# Altium PCB PCB_DE1_projekt_2021-05-03.pcbdoc
Units mm, origin at the board's own origin, x right, y up, seen from the top; angles counter-clockwise.
Board outline 136.4 x 141.67 mm, 2 copper layers (Top Layer, Bottom Layer); 112 components, 90 nets, 322 pads, 73 vias.
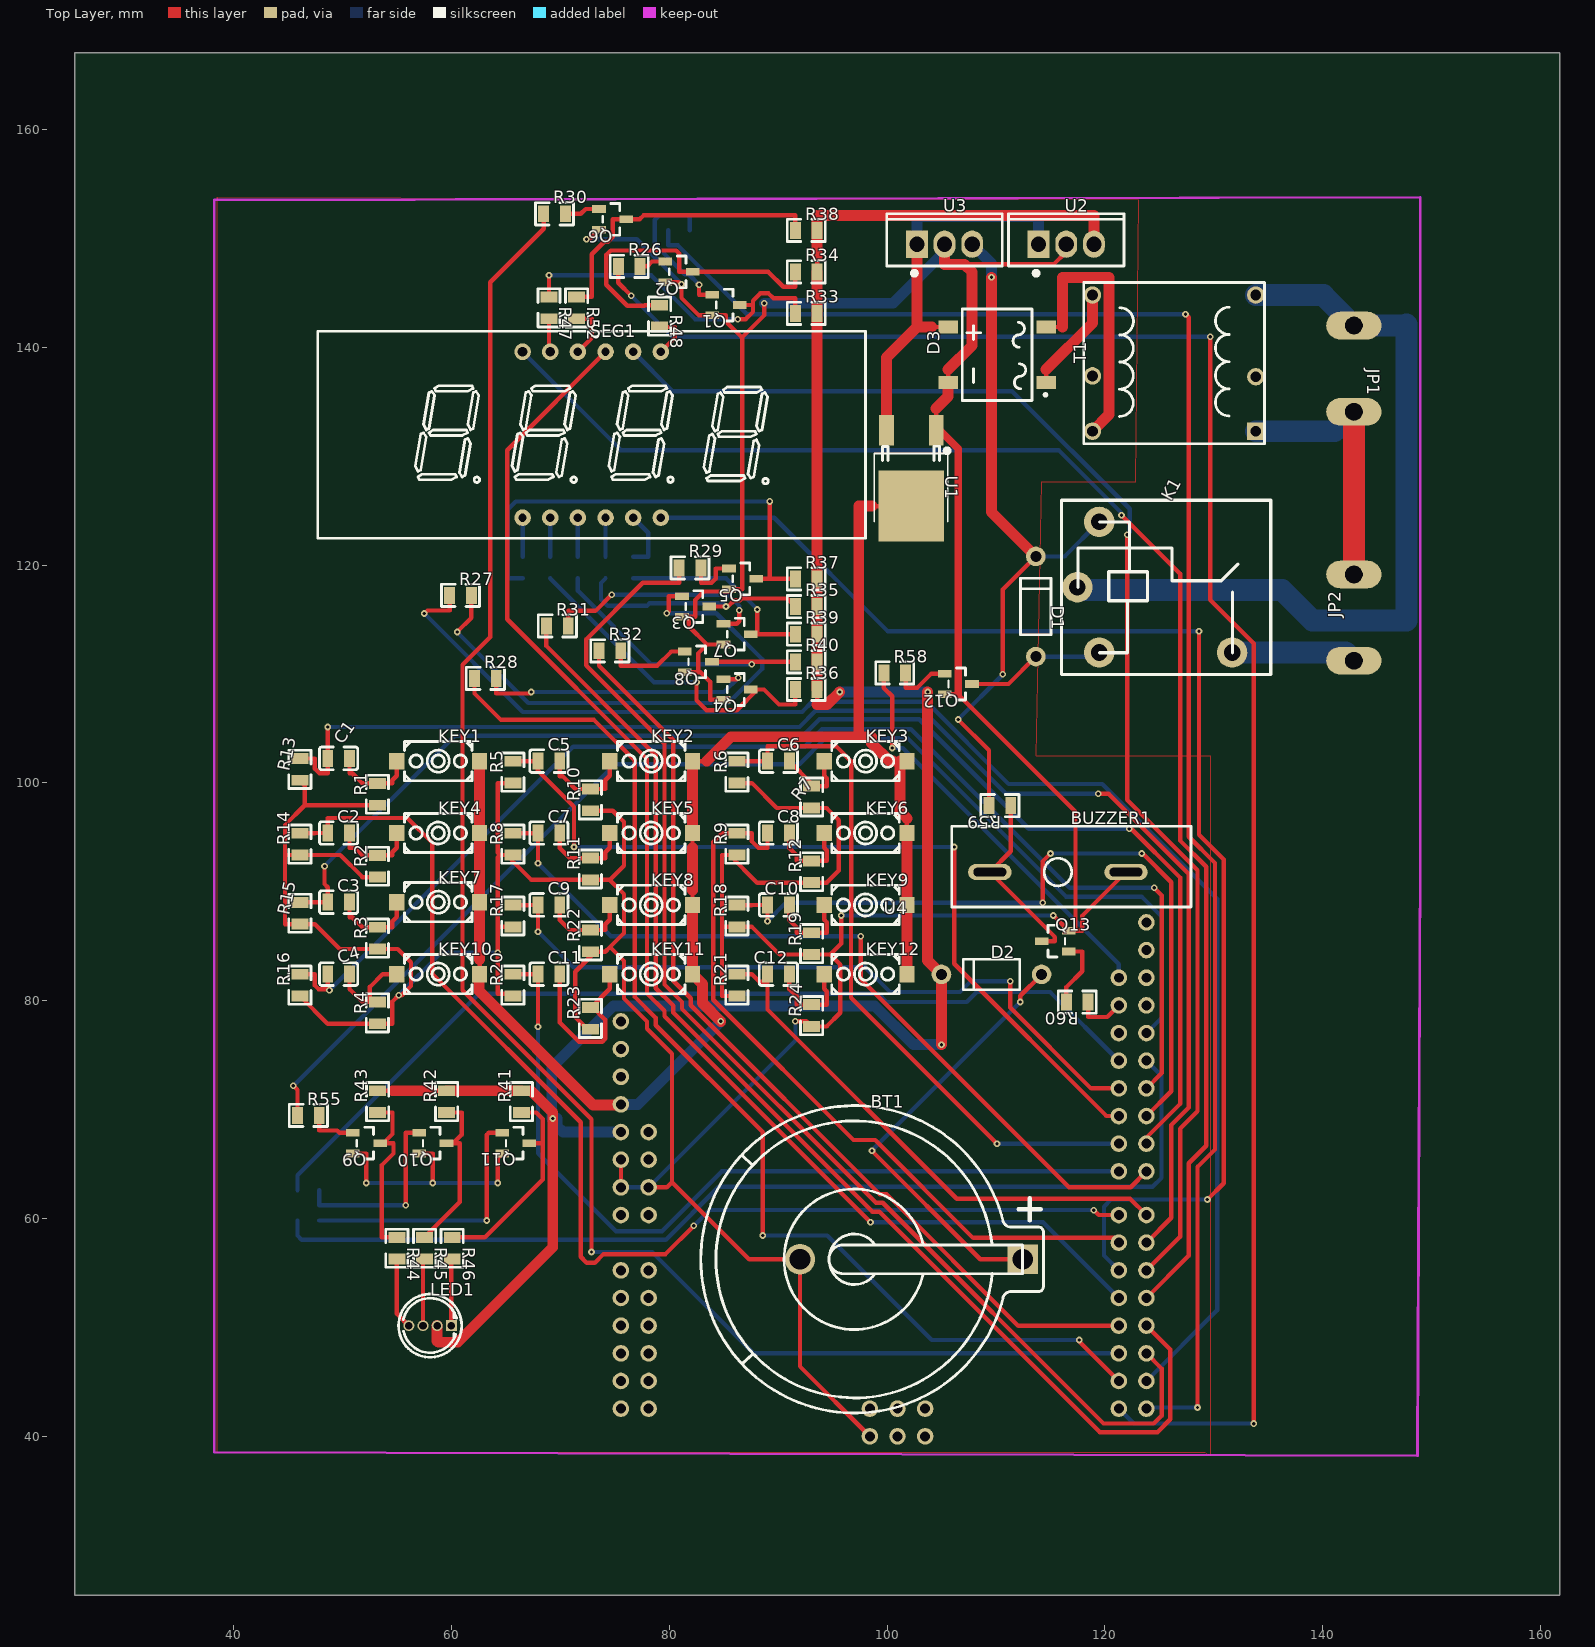
[diagram p0: Top Layer view]
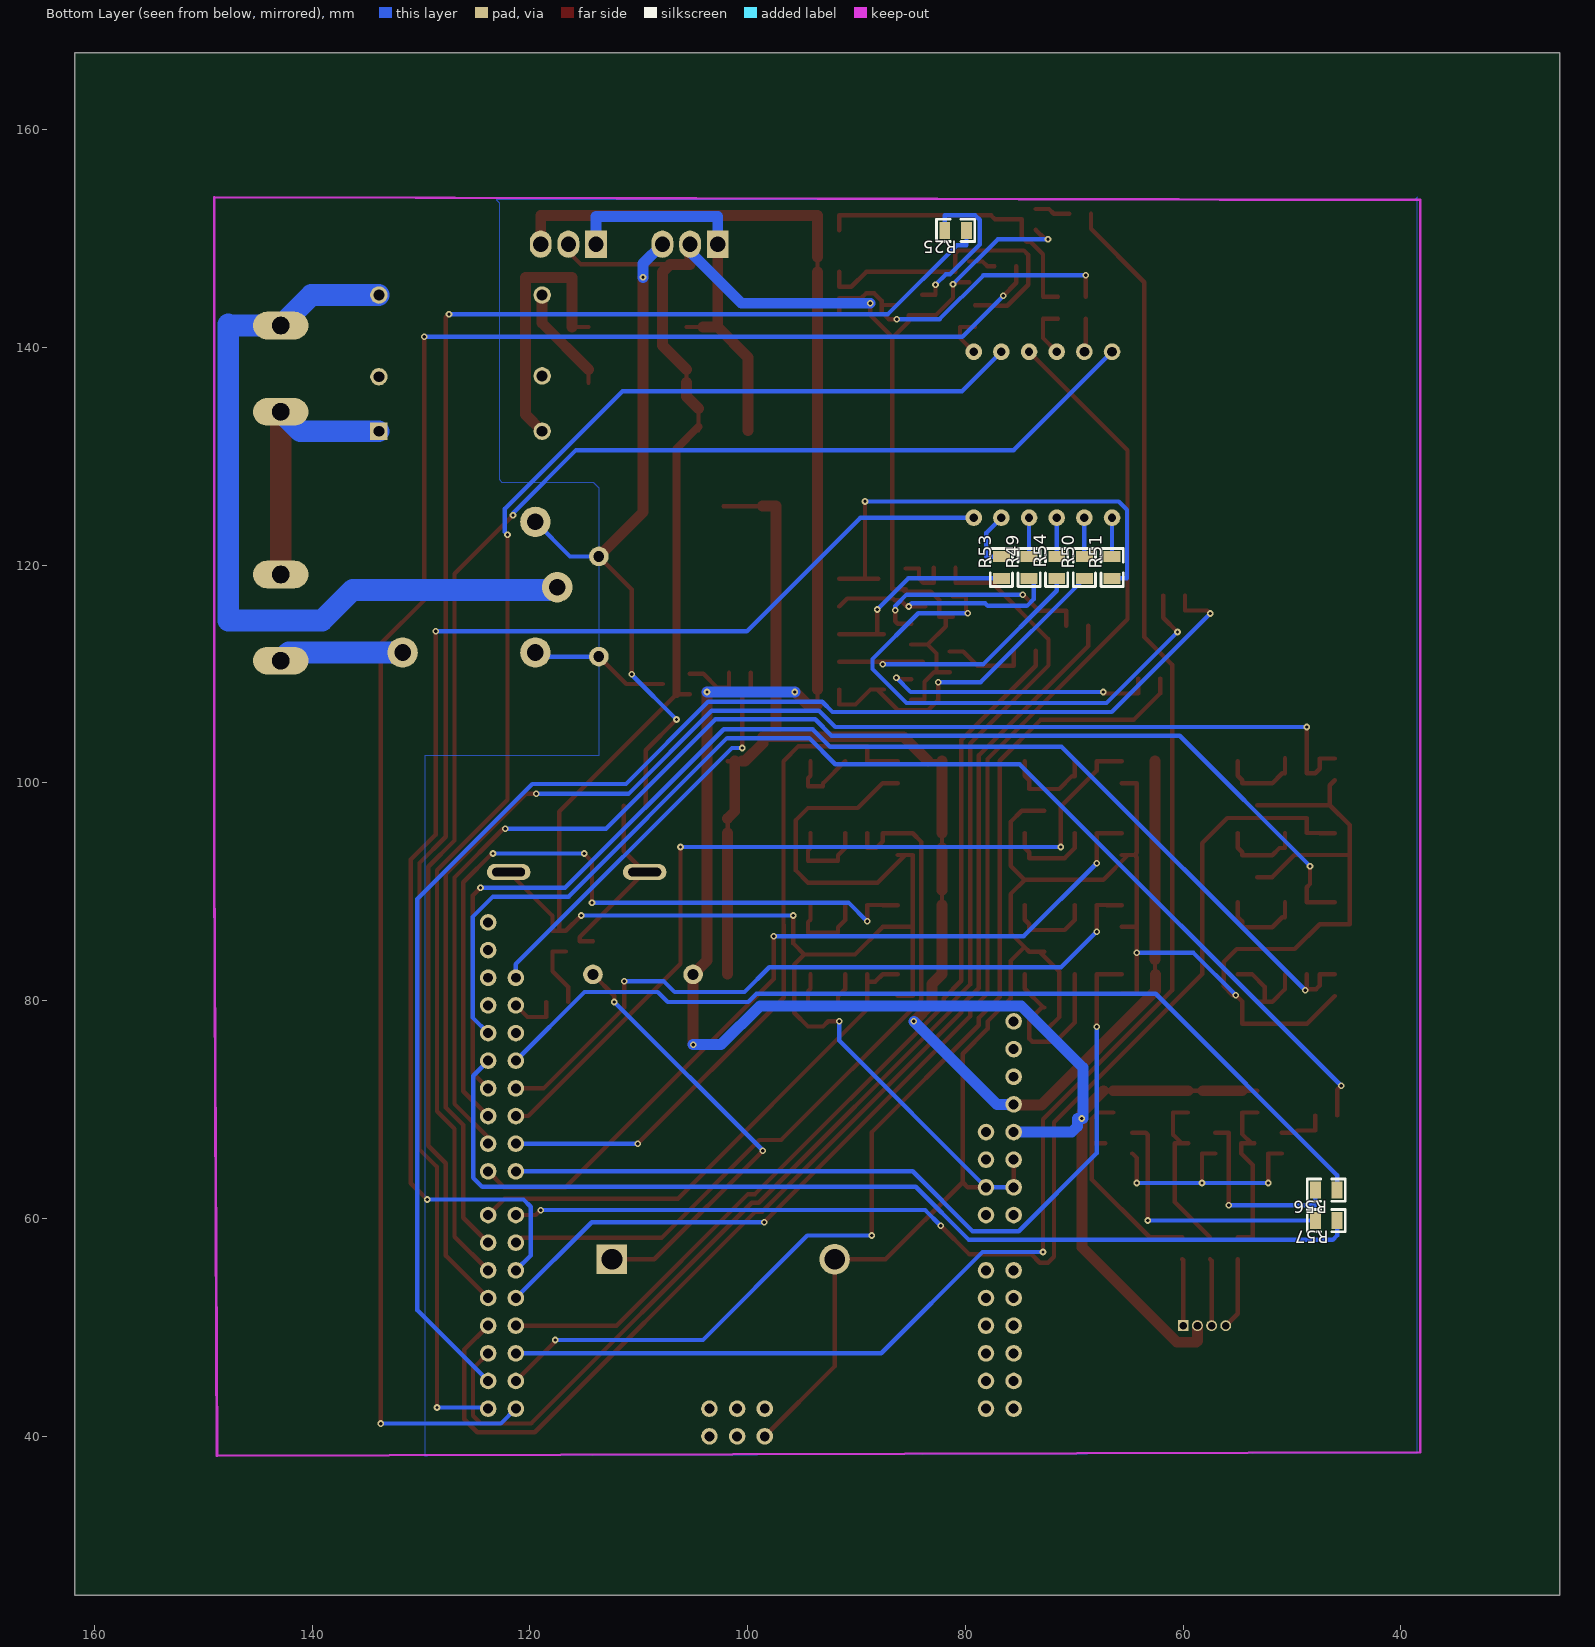
[diagram p1: Bottom Layer view, seen from below]

## Layer stack, top to bottom
Top Layer: signal copper (thickness not stored)
Dielectric: dielectric 0.32, FR-4, Dk 4.8
Bottom Layer: signal copper (thickness not stored)

## Board outline
161.798,25.4 25.4,25.4 25.4,167.069 161.798,167.069

## Components (designator, comment, footprint, x,y, rotation, side; value= is the part's Value field where it differs from the comment)
BT1 "1025" BAT-TH_KEYSTONE-1025 102.235,56.261 r0 top
BUZZER1 "SFN-2207PA12.5" BUZ-TH_L22.0-W7.0-P12.5 115.697,91.821 r0 top
C1 "0.1u" C0805 49.642,102.263 r0 top
C2 "0.1u" C0805 49.642,95.405 r0 top
C3 "0.1u" C0805 49.642,89.055 r0 top
C4 "0.1u" C0805 49.642,82.451 r0 top
C5 "0.1u" C0805 68.946,102.009 r0 top
C6 "0.1u" C0805 90.028,102.009 r0 top
C7 "0.1u" C0805 68.946,95.405 r0 top
C8 "0.1u" C0805 90.028,95.405 r0 top
C9 "0.1u" C0805 68.946,88.801 r0 top
C10 "0.1u" C0805 90.028,88.801 r0 top
C11 "0.1u" C0805 68.946,82.451 r0 top
C12 "0.1u" C0805 90.028,82.451 r0 top
D1 "1N4007" DO-41_BD2.4-L4.7-P8.70-D0.9-RD 113.665,116.205 r270 top
D2 "1N4007" DO-41_BD2.4-L4.7-P8.70-D0.9-RD 109.601,82.423 r0 top
D3 "DB106S" DBS_L8.4-W6.4-P5.10-LS10.2-BL 110.109,139.319 r90 top
JP1 "AC_IN" 1-1123724-2 142.875,138.049 r270 top
JP2 "Electromagnet" 1-1123724-2 142.875,115.189 r90 top
K1 "HF3F-L/12-1HL1T" RELAY-TH_HF3F-L-XX-1HL1T 124.587,117.983 r0 top
KEY1 "K2-3.6×6.1_SMD" KEY-SMD_2P-L6.2-W3.6-LS8.0 58.786,102.009 r0 top
KEY2 "K2-3.6×6.1_SMD" KEY-SMD_2P-L6.2-W3.6-LS8.0 78.344,102.009 r0 top
KEY3 "K2-3.6×6.1_SMD" KEY-SMD_2P-L6.2-W3.6-LS8.0 98.029,102.009 r0 top
KEY4 "K2-3.6×6.1_SMD" KEY-SMD_2P-L6.2-W3.6-LS8.0 58.786,95.405 r0 top
KEY5 "K2-3.6×6.1_SMD" KEY-SMD_2P-L6.2-W3.6-LS8.0 78.344,95.405 r0 top
KEY6 "K2-3.6×6.1_SMD" KEY-SMD_2P-L6.2-W3.6-LS8.0 98.029,95.405 r0 top
KEY7 "K2-3.6×6.1_SMD" KEY-SMD_2P-L6.2-W3.6-LS8.0 58.786,89.055 r0 top
KEY8 "K2-3.6×6.1_SMD" KEY-SMD_2P-L6.2-W3.6-LS8.0 78.344,88.801 r0 top
KEY9 "K2-3.6×6.1_SMD" KEY-SMD_2P-L6.2-W3.6-LS8.0 98.029,88.801 r0 top
KEY10 "K2-3.6×6.1_SMD" KEY-SMD_2P-L6.2-W3.6-LS8.0 58.786,82.451 r0 top
KEY11 "K2-3.6×6.1_SMD" KEY-SMD_2P-L6.2-W3.6-LS8.0 78.344,82.451 r0 top
KEY12 "K2-3.6×6.1_SMD" KEY-SMD_2P-L6.2-W3.6-LS8.0 98.029,82.451 r0 top
LED1 "RGB" LED-TH_4P-BD5.8-P1.30 58.039,50.165 r0 top
Q1 "NSS12201LT1G" SOT-23-3_L2.9-W1.3-P1.90-LS2.4-BR 85.217,143.891 r180 top
Q2 "NSS12201LT1G" SOT-23-3_L2.9-W1.3-P1.90-LS2.4-BR 80.899,146.939 r180 top
Q3 "NSS12201LT1G" SOT-23-3_L2.9-W1.3-P1.90-LS2.4-BR 82.423,116.205 r180 top
Q4 "NSS12201LT1G" SOT-23-3_L2.9-W1.3-P1.90-LS2.4-BR 86.233,108.585 r180 top
Q5 "NSS12201LT1G" SOT-23-3_L2.9-W1.3-P1.90-LS2.4-BR 86.741,118.745 r180 top
Q6 "NSS12201LT1G" SOT-23-3_L2.9-W1.3-P1.90-LS2.4-BR 74.803,151.765 r180 top
Q7 "NSS12201LT1G" SOT-23-3_L2.9-W1.3-P1.90-LS2.4-BR 86.233,113.665 r180 top
Q8 "NSS12201LT1G" SOT-23-3_L2.9-W1.3-P1.90-LS2.4-BR 82.677,111.125 r180 top
Q9 "NSS12201LT1G" SOT-23-3_L2.9-W1.3-P1.90-LS2.4-BR 52.197,66.929 r180 top
Q10 "NSS12201LT1G" SOT-23-3_L2.9-W1.3-P1.90-LS2.4-BR 58.293,66.929 r180 top
Q11 "NSS12201LT1G" SOT-23-3_L2.9-W1.3-P1.90-LS2.4-BR 65.913,66.929 r180 top
Q12 "NSS12201LT1G" SOT-23-3_L2.9-W1.3-P1.90-LS2.4-BR 106.553,109.093 r180 top
Q13 "NSS12201LT1G" SOT-23-3_L2.9-W1.3-P1.90-LS2.4-BR 115.443,85.471 r0 top
R1 "10k" R0805#1 53.198,98.961 r90 top
R2 "10k" R0805#1 53.198,92.357 r90 top
R3 "10k" R0805#1 53.198,85.753 r90 top
R4 "10k" R0805#1 53.198,78.895 r90 top
R5 "1k" R0805#1 65.644,100.993 r90 top
R6 "1k" R0805#1 86.218,100.993 r90 top
R7 "10k" R0805#1 93.076,98.707 r90 top
R8 "1k" R0805#1 65.644,94.389 r90 top
R9 "1k" R0805#1 86.218,94.389 r90 top
R10 "10k" R0805#1 72.756,98.453 r90 top
R11 "10k" R0805#1 72.756,92.103 r90 top
R12 "10k" R0805#1 93.076,91.849 r90 top
R13 "1k" R0805#1 46.086,101.247 r90 top
R14 "1k" R0805#1 46.086,94.389 r90 top
R15 "1k" R0805#1 46.086,88.039 r90 top
R16 "1k" R0805#1 46.086,81.435 r90 top
R17 "1k" R0805#1 65.644,87.785 r90 top
R18 "1k" R0805#1 86.218,87.785 r90 top
R19 "10k" R0805#1 93.076,85.245 r90 top
R20 "1k" R0805#1 65.644,81.435 r90 top
R21 "1k" R0805#1 86.218,81.435 r90 top
R22 "10k" R0805#1 72.756,85.499 r90 top
R23 "10k" R0805#1 72.756,78.387 r90 top
R24 "10k" R0805#1 93.076,78.641 r90 top
R25 "1k" R0805#2 80.899,150.749 r180 bottom
R26 "1k" R0805#1 76.327,147.447 r0 top
R27 "1k" R0805#1 60.833,117.221 r0 top
R28 "1k" R0805#1 63.119,109.601 r0 top
R29 "1k" R0805#1 81.915,119.761 r0 top
R30 "1k" R0805#1 69.469,152.273 r0 top
R31 "1k" R0805#1 69.723,114.427 r0 top
R32 "1k" R0805#1 74.549,112.141 r0 top
R33 "1k" R0805#1 92.583,143.129 r0 top
R34 "1k" R0805#1 92.583,146.939 r0 top
R35 "1k" R0805#1 92.583,116.205 r0 top
R36 "1k" R0805#1 92.583,108.585 r0 top
R37 "1k" R0805#1 92.583,118.745 r0 top
R38 "1k" R0805#1 92.583,150.749 r0 top
R39 "1k" R0805#1 92.583,113.665 r0 top
R40 "1k" R0805#1 92.583,111.125 r0 top
R41 "1k" R0805#1 66.421,70.739 r90 top
R42 "1k" R0805#1 59.563,70.739 r90 top
R43 "1k" R0805#1 53.213,70.739 r90 top
R44 "1k" R0805#1 54.991,57.277 r270 top
R45 "1k" R0805#1 57.531,57.277 r270 top
R46 "1k" R0805#1 60.071,57.277 r270 top
R47 "1k" R0805#1 68.961,143.637 r270 top
R48 "1k" R0805#1 79.121,142.875 r270 top
R49 "1k" R0805#2 74.153,119.789 r270 bottom
R50 "1k" R0805#2 69.073,119.789 r270 bottom
R51 "1k" R0805#2 66.533,119.789 r270 bottom
R52 "1k" R0805#1 71.501,143.637 r270 top
R53 "1k" R0805#2 76.693,119.789 r270 bottom
R54 "1k" R0805#2 71.613,119.789 r270 bottom
R55 "1k" R0805#1 46.863,69.469 r0 top
R56 "1k" R0805#2 46.863,62.611 r180 bottom
R57 "1k" R0805#2 46.863,59.817 r180 bottom
R58 "1k" R0805#1 100.711,110.109 r0 top
R59 "1k" R0805#1 110.363,97.917 r180 top
R60 "1k" R0805#1 117.475,79.883 r180 top
SEG1 "SEG-TH_0.56×4" LED-SEG-TH_12P-L50.3-W19.0-P2.54-S15.24-BL 72.883,131.981 r0 top
T1 "T60403-K4096-X047" IND-TH_6P-L14.8-W16.6-P5.00-D0.5-S15.00 126.365,138.557 r90 top
U1 "LD1117DT33CTR" TO-252-2_L6.5-W6.1-P4.58-LS10.0-TL 102.235,128.905 r270 top
U2 "7805" TO-220-3_L10.0-W4.5-P2.54-L 116.459,149.479 r0 top
U3 "7812(TO-220)" TO-220-3_L10.0-W4.5-P2.54-L 105.283,149.479 r0 top
U4 "ARTY SHIELD" ARTYZ7-SHIELD 75.565,78.105 r0 top

## Footprints (in the part's own frame and the unit in brackets; to place one, negate y for a bottom-side part, rotate by r counter-clockwise, add the part's x,y. Pads: shape width x height; smd on the part's side, far side on the other; paste and mask are expansions set on the pad)
1-1123724-2 [mil]
  oval 100x200 hole 63: 12VIN(-155.91,0) VCC(155.91,0)
ARTYZ7-SHIELD [mil]
  round 60 hole 36: 1(0,0) 2(0,-100) 3(0,-200) 4(0,-300) 5(0,-400) 6(100,-400) 7(0,-500) 8(100,-500) 9(0,-600) 10(100,-600) 11(0,-700) 12(100,-700) 13(0,-900) 14(100,-900) 15(0,-1000) 16(100,-1000) 17(0,-1100) 18(100,-1100) 19(0,-1200) 20(100,-1200) 21(0,-1300) 22(100,-1300) 23(0,-1400) 24(100,-1400) 25(1900,357.87) 26(1900,257.87) 27(1800,157.87) 28(1900,157.87) 29(1800,57.87) 30(1900,57.87) 31(1800,-42.13) 32(1900,-42.13) 33(1800,-142.13) 34(1900,-142.13) 35(1800,-242.13) 36(1900,-242.13) 37(1800,-342.13) 38(1900,-342.13) 39(1800,-442.13) 40(1900,-442.13) 41(1800,-542.13) 42(1900,-542.13) 43(1800,-700) 44(1900,-700) 45(1800,-800) 46(1900,-800) 47(1800,-900) 48(1900,-900) 49(1800,-1000) 50(1900,-1000) 51(1800,-1100) 52(1900,-1100) 53(1800,-1200) 54(1900,-1200) 55(1800,-1300) 56(1900,-1300) 57(1800,-1400) 58(1900,-1400) 59(900,-1400) 60(1000,-1400) 61(1100,-1400) 62(900,-1500) 63(1000,-1500) 64(1100,-1500)
BAT-TH_KEYSTONE-1025 [mm]
  rect 2.8x2.7 hole 1.9: 1(10.225,0)
  round 2.8 hole 1.9: 2(-10.225,0)
  silkscreen extent -19.34,-14.12 12.12,14.11
BUZ-TH_L22.0-W7.0-P12.5 [mm]
  oval 4x1.5 hole 0.8 slot 3 at 0 deg: 1(-6.25,0) 2(6.25,0)
  silkscreen extent -9.75,-3.2 12.22,4.2
C0805 [mm]
  rect 1x1.55 smd: 1(-1,0) 2(1,0)
  silkscreen extent -1.75,-1.04 1.75,1.04
DBS_L8.4-W6.4-P5.10-LS10.2-BL [mm]
  rect 1.2x1.8 smd: 1(-2.55,-4.5) 2(2.55,-4.5) 3(2.55,4.5) 4(-2.55,4.5)
  silkscreen extent -4.2,-4.57 4.2,3.2
DO-41_BD2.4-L4.7-P8.70-D0.9-RD [mm]
  round 1.8 hole 1: 1(-4.6,0) 2(4.6,0)
  silkscreen extent -2.6,-1.4 2.6,1.4
IND-TH_6P-L14.8-W16.6-P5.00-D0.5-S15.00 [mm]
  rect 1.6x1.6 hole 1: 1(-6.25,-7.5)
  round 1.6 hole 1: 2(-1.25,-7.5) 3(6.25,-7.5) 4(6.25,7.5) 5(-1.17,7.5) 6(-6.25,7.5)
  silkscreen extent -7.4,-8.3 7.4,8.3
KEY-SMD_2P-L6.2-W3.6-LS8.0 [mm]
  rect 1.4x1.5 smd: 1(-3.8,0) 2(3.8,0)
  silkscreen extent -3.1,-1.8 3.1,1.8
LED-SEG-TH_12P-L50.3-W19.0-P2.54-S15.24-BL [mil]
  round 60 hole 30: 1(-250,-300) 2(-150,-300) 3(-50,-300) 4(50,-300) 5(150,-300) 6(250,-300) 7(250,300) 8(150,300) 9(50,300) 10(-50,300)
  round 60 hole 36: 11(-150,300) 12(-250,300)
  silkscreen extent -990,-374 990,374
LED-TH_4P-BD5.8-P1.30 [mm]
  rect 1x1 hole 0.7: 1(1.95,0)
  round 1 hole 0.7: 2(0.65,0) 3(-0.65,0) 4(-1.95,0)
  silkscreen extent -2.9,-2.9 2.9,2.9
R0805#1 [mm]
  rect 1x1.55 smd: 1(-1,0) 2(1,0)
  silkscreen extent -1.75,-1.02 1.75,1.02
R0805#2 [mm]
  rect 1x1.55 smd: 1(1,0) 2(-1,0)
  silkscreen extent -1.75,-1.02 1.75,1.02
RELAY-TH_HF3F-L-XX-1HL1T [mil]
  round 110 hole 60: 1(-200.85,236.2) 2(-200.85,-236.2) 3(279.55,-236.2) 4(-279.55,0)
  silkscreen extent -337,-316 419,314
SOT-23-3_L2.9-W1.3-P1.90-LS2.4-BR [mm]
  rect 1.25x0.7 smd: 1(1.25,-0.95) 2(1.25,0.95) 3(-1.25,0)
  silkscreen extent -0.65,-1.46 0.9,1.46
TO-220-3_L10.0-W4.5-P2.54-L [mm]
  rect 2x2.5 hole 1.4: 1(-2.54,0)
  oval 2x2.5 hole 1.4: 2(0,0) 3(2.54,0)
  silkscreen extent -5.3,-2.86 5.3,2.8
TO-252-2_L6.5-W6.1-P4.58-LS10.0-TL [mm]
  rect 2.8x1.35 smd: 1(-3.475,2.275) 3(-3.475,-2.275)
  rect 6.5x6 smd: 4(3.475,-0.017)
  silkscreen extent -2.01,-3.39 4.9,3.48

## Via types
v1: diameter 0.61, hole 0.31, Top Layer to Bottom Layer, 73 vias

## Nets (pads, with @x,y where several pads share a name; then routed paths per layer and width w, separated by ;. In a path a pad name is that pad's centre, name@x,y a point inside that pad or via, vN(x,y) a via of type N, cw(c..) or ccw(c..) an arc to the next point about the centre after c; other vN are vias at no path point)
+3.3V: KEY1.2 KEY2.2 KEY3.2 KEY4.2 KEY5.2 KEY6.2 KEY7.2 KEY8.2 KEY9.2 KEY10.2 KEY11.2 KEY12.2 U1.4 U4.4 | length 144.5
  Top Layer w0.4: KEY10.2 62.586,83.802 ; KEY8.2 82.144,90.152 ; 82.144,94.054 KEY5.2 ; KEY2.2 83.447,102.009 ; 98.616,125.43 U1.4 ; 100.526,102.009 101.179,102.009 KEY3.2 ; KEY6.2 101.829,96.081 101.829,96.756
  Top Layer w1: KEY10.2@62.527,82.408 62.527,80.919 73.007,70.442 U4.4@75.507,70.442 ; 62.586,83.802 KEY7.2 KEY4.2 KEY1.2 ; KEY8.2 KEY11.2 83.063,81.532 83.063,79.787 v1(84.735,78.113) ; 82.144,90.152 82.144,94.054 ; KEY5.2 KEY2.2 ; 83.447,102.009 85.687,104.249 98.588,104.249 ; 98.616,125.43 97.409,125.43 97.409,104.249 98.588,104.249 ; 100.526,102.009 100.234,102.009 98.588,103.652 98.588,104.249 ; KEY3.2@101.179,102.009 101.179,97.409 101.829,96.756 ; KEY12.2 KEY9.2 KEY6.2
  Bottom Layer w1: U4.4 77.107,70.485 v1(84.735,78.113)
+5V: D2.1 LED1.2 R33.2 R34.2 R35.2 R36.2 R37.2 R38.2 R39.2 R40.2 R41.2 R42.2 R43.2 U2.3 U4.5 | length 212.6
  Top Layer w0.4: R43.2 54.59,71.74 ; 58.187,71.74 R42.2 ; 93.584,107.208 R36.2 ; R34.2 93.584,147.627 93.584,148.316
  Top Layer w1: 54.59,71.74 58.187,71.74 ; LED1.2 58.689,48.753 58.801,48.641 60.579,48.641 69.299,57.361 v1(69.299,69.195) 69.299,69.744 67.303,71.74 ; R42.2 R41.2 ; 93.584,107.208 94.501,107.208 v1(95.654,108.359) ; R36.2 R40.2 R39.2 R35.2 R37.2 R33.2 R34.2 ; 93.584,148.316 R38.2 93.584,152.126 118.999,152.126 U2.3 ; v1(103.731,108.359) 103.731,83.693 D2.1 v1(105.001,75.971)
  Bottom Layer w0.4: v1(69.299,69.195) 69.721,69.195
  Bottom Layer w1: U4.5 70.231,67.945 69.721,68.456 69.721,69.195 69.215,69.195 69.215,73.881 74.867,79.533 98.877,79.533 102.436,75.971 v1(105.001,75.971) ; v1(95.654,108.359) v1(103.731,108.359)
+12V: D1.1 K1.1 R59.2 U3.3 | length 65.2
  Top Layer w0.4: v1(106.53,105.832) 109.362,102.997 R59.2 ; v1(110.632,110.002) 110.632,117.772 D1.1
  Top Layer w1: v1(109.601,146.431) 109.601,124.869 D1.1
  Bottom Layer w0.4: v1(106.53,105.832) 110.632,109.934 v1(110.632,110.002) ; D1.1 116.307,120.805 K1.1@119.484,123.983
  Bottom Layer w1: U3.3 109.601,147.701 v1(109.601,146.431)
A: Q1.3 R33.1 R47.1 | length 31.9
  Top Layer w0.4: R47.1 v1(68.961,146.616) ; v1(86.294,142.598) 87.031,142.598 87.694,143.261 87.694,143.891 ; R33.1 91.582,144.506 89.576,144.506 89.116,144.963 88.364,144.963 87.694,144.292 87.694,143.891 ; 87.694,143.891 Q1.3 87.694,143.891
  Bottom Layer w0.4: v1(68.961,146.616) 78.349,146.616 82.37,142.598 v1(86.294,142.598)
A0: SEG1.12 U4.50 | length 138.7
  Top Layer w0.4: v1(121.539,124.587) 126.914,119.212 126.914,94.724 129.322,92.316 129.322,66.68 127.716,65.075 127.716,56.596 U4.50
  Bottom Layer w0.4: SEG1.12 75.563,130.571 115.761,130.571 121.486,124.846 121.486,124.64 v1(121.539,124.587)
A1: SEG1.9 U4.49 | length 123.2
  Top Layer w0.4: SEG1.9 65.116,130.564 65.116,115.047 77.963,102.202 77.963,80.681 79.566,79.075 79.566,78.585 v1(98.484,59.67)
  Bottom Layer w0.4: v1(98.484,59.67) 114.321,59.67 U4.49
A2: SEG1.8 U4.48 | length 126.2
  Top Layer w0.4: v1(122.047,122.809) 122.047,98.456 128.519,91.984 128.519,69.863 126.914,68.257 126.914,58.334 U4.48
  Bottom Layer w0.4: SEG1.8 80.31,135.984 111.483,135.984 122.288,125.179 122.288,123.051 v1(122.047,122.809)
A3: SEG1.6 U4.47 | length 123.7
  Top Layer w0.4: v1(128.651,113.919) 128.651,95.255 130.927,92.979 130.927,63.249 v1(129.426,61.747)
  Bottom Layer w0.4: SEG1.6 89.642,124.361 100.084,113.919 v1(128.651,113.919) ; U4.47 119.921,56.609 119.921,61.087 120.582,61.747 v1(129.426,61.747)
B: Q2.3 R34.1 R48.1 | length 29.7
  Top Layer w0.4: R48.1 77.745,143.876 77.691,143.822 76.152,143.822 74.224,145.75 74.224,148.499 74.625,148.902 80.648,148.902 80.922,148.628 80.922,146.939 81.544,146.939 Q2.3 89.103,146.939 90.48,145.562 91.582,145.562 R34.1
BT1_1: BT1.1 D2.2 | length 40.6
  Top Layer w0.4: v1(98.618,66.215) 108.573,56.261 BT1.1 ; v1(112.243,79.893) 112.243,80.465 D2.2
  Bottom Layer w0.4: v1(98.618,66.215) 98.618,66.266 v1(112.243,79.893)
BUZZ_PIN: R60.1 U4.29 | length 4.6
  Top Layer w0.4: R60.1 118.476,78.506 120.216,78.506 U4.29
BUZZER1_1: BUZZER1.1 Q13.3 R59.1 | length 16.9
  Top Layer w0.4: R59.1 111.364,93.736 BUZZER1.1 115.42,85.847 115.42,85.471 Q13.3
C: Q3.3 R35.1 R49.1 | length 22.6
  Top Layer w0.4: Q3.3 84.9,116.205 v1(85.212,116.205) 85.39,116.205 85.964,116.779 86.497,116.779 86.655,116.939 90.848,116.939 R35.1
  Bottom Layer w0.4: R49.1 73.736,118.372 73.736,116.881 74.351,116.263 77.953,116.263 78.189,116.5 84.918,116.5 v1(85.212,116.205)
C5_2: C5.2 KEY2.1 R10.2 | length 8.8
  Top Layer w0.4: C5.2 69.947,100.632 70.201,100.632 71.379,99.454 R10.2 73.444,99.454 74.133,99.454 74.133,100.246 74.544,100.658 KEY2.1
C6_2: C6.2 KEY3.1 R7.2 | length 6.9
  Top Layer w0.4: C6.2 93.076,99.962 R7.2 94.453,99.708 94.453,100.432 94.229,100.658 KEY3.1
C7_2: C7.2 KEY5.1 R11.2 | length 8.4
  Top Layer w0.4: C7.2 69.947,94.028 70.871,93.104 71.379,93.104 R11.2 74.133,93.104 74.133,93.642 74.544,94.054 KEY5.1
C8_2: C8.2 KEY6.1 R12.2 | length 8.2
  Top Layer w0.4: C8.2 91.029,94.028 91.699,93.358 91.699,92.85 R12.2 94.453,92.85 94.453,93.828 94.229,94.054 KEY6.1
C9_2: C9.2 KEY8.1 R22.2 | length 8.4
  Top Layer w0.4: C9.2 69.947,87.424 70.871,86.5 71.379,86.5 R22.2 74.133,86.5 74.133,87.038 74.544,87.45 KEY8.1
C10_2: C10.2 KEY9.1 R19.2 | length 8.2
  Top Layer w0.4: C10.2 91.029,87.424 91.699,86.754 91.699,86.246 R19.2 94.453,86.246 94.453,87.224 94.229,87.45 KEY9.1
C11_2: C11.2 KEY11.1 R23.2 | length 16.9
  Top Layer w0.4: C11.2 69.947,78.011 71.72,76.238 73.846,76.238 74.133,76.525 74.133,78.247 72.995,79.388 R23.2@72.794,79.388 ; R23.2 R23.2@72.794,79.388 ; KEY11.1 74.544,81.1 72.832,79.388 R23.2@72.794,79.388
C12_2: C12.2 KEY12.1 R24.2 | length 8.7
  Top Layer w0.4: C12.2 91.029,81.074 91.699,80.404 91.699,79.642 R24.2 94.453,79.642 94.453,80.874 94.229,81.1 KEY12.1
CA: R25.1 U4.58 | length 158.4
  Top Layer w0.4: v1(127.417,143.06) 127.717,142.763 127.717,95.057 130.124,92.647 130.124,66.347 128.519,64.742 v1(128.519,42.649)
  Bottom Layer w0.4: R25.1 79.898,149.372 80.803,149.372 87.115,143.06 v1(127.417,143.06) ; U4.58 123.929,42.649 v1(128.519,42.649)
CB: R26.1 U4.57 | length 172.4
  Top Layer w0.4: R26.1 75.326,145.931 v1(76.528,144.729) ; v1(129.682,140.965) 129.682,116.817 133.688,112.812 v1(133.688,41.173)
  Bottom Layer w0.4: v1(76.528,144.729) 80.292,140.965 v1(129.682,140.965) ; U4.57 122.657,41.173 v1(133.688,41.173)
CC: R27.1 U4.56 | length 135.2
  Top Layer w0.4: v1(57.519,115.56) 57.8,115.844 59.832,115.844 R27.1
  Bottom Layer w0.4: v1(57.519,115.56) 66.553,106.523 92.205,106.523 93.134,107.452 103.625,107.452 111.168,99.908 119.774,99.908 130.333,89.347 130.333,51.593 U4.56
CD: R28.1 U4.55 | length 105.4
  Top Layer w0.4: R28.1 62.118,108.224 64.552,105.794 73.096,105.794 76.845,102.045 76.845,80.345 78.763,78.428 78.763,77.762 88.585,67.943 v1(88.585,58.44) ; v1(117.656,48.852) 117.656,48.715 U4.55
  Bottom Layer w0.4: v1(88.585,58.44) 94.514,58.44 104.102,48.852 v1(117.656,48.852)
CDP: R32.1 U4.51 | length 87.5
  Top Layer w0.4: R32.1 73.548,110.764 80.371,103.942 80.371,81.834 81.976,80.228 81.976,79.591 99.319,62.245 99.959,62.245 112.04,50.165 U4.51
CE: R29.1 U4.54 | length 116.1
  Top Layer w0.4: R29.1 80.914,118.384 77.564,118.384 72.372,113.19 72.372,110.802 79.568,103.604 79.568,81.493 81.174,79.888 81.174,79.253 98.984,61.443 99.619,61.443 119.881,41.181 124.506,41.181 125.217,41.892 125.217,46.233 U4.54
CF: R30.1 U4.53 | length 155.6
  Top Layer w0.4: R30.1 68.468,150.896 63.566,145.992 63.566,113.411 61.016,110.863 61.016,80.97 72.868,69.119 v1(72.868,56.929)
  Bottom Layer w0.4: v1(72.868,56.929) 78.428,56.929 87.732,47.625 U4.53
CG: R31.1 U4.52 | length 111.9
  Top Layer w0.4: R31.1 68.722,112.575 78.766,102.535 78.766,81.161 80.371,79.555 80.371,78.923 98.651,60.64 99.286,60.64 119.548,40.378 124.836,40.378 126.02,41.56 126.02,47.97 U4.52
D: Q4.3 R36.1 R50.1 | length 31.8
  Top Layer w0.4: v1(82.507,109.261) 82.507,107.6 83.424,106.683 86.195,106.683 Q4.3@88.098,108.585 ; Q4.3 Q4.3@88.098,108.585 ; R36.1 91.582,107.208 90.086,107.208 88.71,108.585 Q4.3@88.098,108.585
  Bottom Layer w0.4: R50.1 78.601,109.261 v1(82.507,109.261)
DP: Q8.3 R40.1 R54.1 | length 27.8
  Top Layer w0.4: Q8.3 85.154,111.125 v1@87.587,111.125 ; v1(87.587,110.894) v1@87.587,111.125 ; R40.1 v1@87.587,111.125
  Bottom Layer w0.4: R54.1 71.613,117.653 78.372,110.894 v1(87.587,110.894)
E: Q5.3 R37.1 R51.1 | length 44
  Top Layer w0.4: v1(89.218,125.857) 89.218,118.745 ; R37.1 89.218,118.745 ; 89.218,118.745 Q5.3 89.218,118.745
  Bottom Layer w0.4: R51.1 65.156,118.788 65.156,125.103 65.908,125.857 v1(89.218,125.857)
F: Q6.3 R38.1 R52.1 | length 27.8
  Top Layer w0.4: R52.1 72.878,144.638 72.878,148.554 74.031,149.705 74.379,149.705 74.826,150.152 74.826,151.765 Q6.3 76.668,151.765 77.28,151.765 77.64,152.126 91.582,152.126 R38.1
G: Q7.3 R39.1 R53.1 | length 19
  Top Layer w0.4: Q7.3 Q7.3@88.098,113.665 ; v1(88.098,115.936) Q7.3@88.098,113.665 ; R39.1 88.71,113.665 Q7.3@88.098,113.665
  Bottom Layer w0.4: R53.1 78.07,118.788 85.245,118.788 v1(88.098,115.936)
GND: BT1.2 BUZZER1.2 D3.4 Q1.2 Q2.2 Q3.2 Q4.2 Q5.2 Q6.2 Q7.2 Q8.2 Q12.2 Q13.2 R1.1 R2.1 R3.1 R4.1 R5.1 R6.1 R7.1 R8.1 R9.1 R10.1 R11.1 R12.1 R13.1 R14.1 R15.1 R16.1 R17.1 R18.1 R19.1 R20.1 R21.1 R22.1 R23.1 R24.1 U1.1 U2.2 U3.2 U4.7 U4.9 U4.10 U4.62 | length 489.7
  Top Layer w0.4: R16.1 48.626,77.894 R4.1 54.575,77.894 54.575,79.929 v1(55.156,80.508) 55.441,80.508 56.289,81.359 56.289,83.536 55.073,84.752 R3.1 53.17,84.752 51.821,84.752 49.749,84.752 47.463,87.038 46.774,87.038 R15.1 44.709,87.038 44.709,93.388 ; R13.1 46.53,99.802 46.53,97.96 ; R2.1 53.17,91.356 51.821,91.356 49.789,93.388 47.463,93.388 R14.1 44.709,93.388 ; R1.1 46.53,97.96 ; 64.247,80.645 v1(64.267,84.397) 64.267,86.784 ; 64.282,80.645 R20.1@65.659,80.645 ; R17.1 64.267,86.784 ; R8.1 R8.1@65.057,93.388 ; R5.1 64.267,99.992 64.267,93.589 64.468,93.388 ; v1(72.408,149.931) 72.67,149.931 Q6.2 ; R23.1 72.494,77.386 71.364,78.517 71.364,82.664 R22.1@73.2,84.498 ; R22.1 R22.1@73.2,84.498 ; R10.1 74.821,97.452 75.847,96.426 75.847,92.405 74.544,91.102 ; U4.9 U4.7 ; U4.10 79.774,62.865 80.252,63.343 ; Q2.2 80.876,145.989 81.052,145.814 v1(81.133,145.814) 81.133,144.549 82.741,142.941 83.914,142.941 Q1.2 85.194,142.941 85.194,142.39 86.673,140.914 ; Q3.2 Q3.2@81.788,115.255 ; Q8.2 81.864,110.175 82.654,110.175 ; Q4.2 83.757,107.635 83.757,109.294 82.875,110.175 82.654,110.175 ; Q7.2 83.475,112.715 ; Q5.2 Q5.2@85.799,117.795 ; R21.1 84.841,80.434 84.841,86.784 ; R9.1 R9.1@85.53,93.388 ; R6.1 87.595,99.992 89.881,97.706 R7.1 94.453,97.706 95.568,96.594 95.568,91.963 94.453,90.848 R12.1 88.07,90.848 R9.1@85.53,93.388 ; v1(88.74,144.056) 88.74,142.982 86.673,140.914 ; v1(91.59,78.125) 92.593,78.125 R24.1 94.453,77.64 95.71,78.898 95.71,83.32 94.788,84.244 ; v1(95.796,87.831) 95.796,85.255 94.788,84.244 ; U4.62 92.009,46.421 BT1.2 87.333,56.261 80.252,63.343 ; U1.1 104.511,132.707 104.511,133.035 104.511,133.381 104.511,134.381 ; Q12.2 105.525,108.143 106.53,108.143 117.308,97.366 Q13.2@117.308,86.421 ; D3.4 105.608,137.97 ; 107.112,147.622 115.298,147.622 116.459,148.783 U2.2 ; v1(115.283,87.831) Q13.2 Q13.2@117.308,86.421 ; BUZZER1.2 117.92,87.795 117.92,86.421 Q13.2@117.308,86.421 ; 44.709,93.388 44.709,96.139 46.53,97.96 ; 64.267,86.784 64.267,93.188 64.468,93.388 ; 64.468,93.388 64.567,93.388 R8.1@65.057,93.388 ; R8.1@65.057,93.388 67.343,91.102 R11.1 74.544,91.102 ; R22.1@73.2,84.498 74.133,84.498 74.567,84.93 ; 74.544,91.102 75.847,89.799 75.847,86.213 74.567,84.93 ; 74.567,84.93 75.85,83.647 75.85,80.206 77.96,78.095 77.96,77.432 80.252,75.141 80.252,63.343 ; Q3.2@81.788,115.255 82.4,115.255 82.4,116.804 83.178,117.582 85.583,117.582 Q5.2@85.799,117.795 ; Q3.2@81.788,115.255 81.788,114.404 83.475,112.715 ; 82.654,110.175 82.654,111.895 83.475,112.715 ; 84.841,86.784 85.53,86.784 R18.1 87.595,86.784 90.135,84.244 91.699,84.244 93.048,84.244 R19.1 94.788,84.244 ; 84.841,86.784 84.841,93.388 R9.1@85.53,93.388 ; Q5.2@85.799,117.795 86.718,117.795 86.718,140.866 86.673,140.914
  Top Layer w0.7: U1.1@104.511,132.707 106.53,130.688 106.53,108.143
  Top Layer w1: 104.511,134.381 105.608,135.481 D3.4 ; U3.2 105.283,147.622 107.112,147.622 107.823,146.939 107.823,140.185 105.608,137.97
  Bottom Layer w0.4: v1(55.156,80.508) 59.045,84.397 v1(64.267,84.397) ; v1(72.408,149.931) 77.016,149.931 v1(81.133,145.814) ; U4.9 U4.10 91.59,76.35 v1(91.59,78.125) ; v1(95.796,87.831) v1(115.283,87.831)
  Bottom Layer w1: v1(88.74,144.056) 100.561,144.056 105.283,148.781 U3.2
K1_2: D1.2 K1.2 Q12.3 | length 12.9
  Top Layer w0.4: Q12.3 109.03,109.093 111.153,109.093 D1.2
  Bottom Layer w0.4: D1.2 119.106,111.605 K1.2@119.484,111.984
K1_3: JP2.12VIN K1.3 | length 11.5
  Bottom Layer w2: K1.3@131.687,111.984 142.121,111.984 JP2.12VIN
KEY1_1: C1.2 KEY1.1 R1.2 | length 7.9
  Top Layer w0.4: C1.2 50.643,100.886 50.897,100.886 51.821,99.962 R1.2 54.575,99.962 54.575,100.246 54.986,100.658 KEY1.1
KEY4_1: C2.2 KEY4.1 R2.2 | length 7.8
  Top Layer w0.4: C2.2 50.643,94.028 51.151,94.028 51.821,93.358 R2.2 53.886,93.358 54.575,93.358 54.575,93.642 54.986,94.054 KEY4.1
KEY7_1: C3.2 KEY7.1 R3.2 | length 8.2
  Top Layer w0.4: C3.2 50.643,87.678 50.897,87.678 51.821,86.754 R3.2 53.886,86.754 54.575,86.754 54.575,87.292 54.986,87.704 KEY7.1
KEY10_1: C4.2 KEY10.1 R4.2 | length 8.8
  Top Layer w0.4: C4.2 50.643,81.074 51.821,79.896 R4.2@52.51,79.896 ; R4.2 R4.2@52.51,79.896 ; KEY10.1 53.683,82.451 52.51,81.278 R4.2@52.51,79.896
L: JP1.VCC JP2.VCC T1.1 | length 24.7
  Top Layer w2: JP2.VCC JP1.VCC
  Bottom Layer w2: T1.1 141.092,132.306 JP1.VCC
LED1_1: LED1.1 R46.2 | length 6.1
  Top Layer w0.4: LED1.1 59.99,56.195 R46.2
LED1_3: LED1.3 R45.2 | length 6.2
  Top Layer w0.4: LED1.3 57.389,56.134 R45.2
LED1_4: LED1.4 R44.2 | length 6.6
  Top Layer w0.4: R44.2 54.991,51.262 LED1.4
LED_RGB_B: R55.1 U4.32 | length 113.9
  Top Layer w0.4: v1(45.489,72.2) 45.862,71.829 R55.1
  Bottom Layer w0.4: v1(45.489,72.2) 75.019,101.73 91.953,101.73 94.343,104.12 101.88,104.12 116.434,89.568 123.383,89.568 125.255,87.694 125.255,78.466 U4.32
LED_RGB_G: R56.1 U4.33 | length 87
  Bottom Layer w0.4: R56.1 45.862,63.988 62.52,80.645 99.187,80.645 99.949,79.883 107.325,79.883 108.242,80.8 114.981,80.8 U4.33
LED_RGB_R: R57.1 U4.34 | length 94.6
  Bottom Layer w0.4: R57.1 45.862,58.44 46.264,58.039 79.675,58.039 84.552,62.913 124.384,62.913 125.204,63.736 125.204,73.114 U4.34
N: JP1.12VIN K1.4 T1.3 | length 73.7
  Bottom Layer w2: K1.4 117.74,117.729 136.271,117.729 139.065,114.935 147.701,114.935 147.701,142.113 147.597,142.009 JP1.12VIN 140.076,144.808 T1.3
PB0: C5.1 R5.2 U4.37 | length 78.1
  Top Layer w0.4: R5.2 C5.1@67.93,101.994 ; C5.1 C5.1@67.93,101.994 ; v1(71.255,94.12) 71.255,97.815 67.93,101.14 C5.1@67.93,101.994 ; v1(106.167,94.12) 106.167,83.398 120.15,69.416 U4.37
  Bottom Layer w0.4: v1(71.255,94.12) v1(106.167,94.12)
PB1: C1.1 R13.2 U4.46 | length 129.3
  Top Layer w0.4: R13.2 47.463,102.248 47.463,101.303 47.879,100.886 48.641,100.886 48.641,101.575 C1.1 v1(48.641,105.141) ; v1(119.398,98.999) 120.366,98.999 127.717,91.651 127.717,70.195 126.111,68.59 126.111,60.071 U4.46
  Bottom Layer w0.4: v1(48.641,105.141) 91.958,105.141 93.465,106.65 103.292,106.65 110.942,98.999 v1(119.398,98.999)
PB2: C8.1 R9.2 U4.45 | length 68.7
  Top Layer w0.4: C8.1 89.027,94.028 88.202,94.028 87.595,94.635 87.595,95.39 86.246,95.39 R9.2 84.841,95.39 84.039,94.585 84.039,80.094 96.922,67.211 98.926,67.211 107.91,58.227 120.843,58.227 U4.45
PB3: C12.1 R21.2 U4.44 | length 49
  Top Layer w0.4: R21.2 87.595,82.436 88.268,81.763 C12.1@89.027,81.763 ; C12.1 C12.1@89.027,81.763 ; U4.44 122.322,61.829 106.398,61.829 89.027,79.197 C12.1@89.027,81.763
PB4: C2.1 R14.2 U4.43 | length 110
  Top Layer w0.4: R14.2 46.114,95.39 47.463,95.39 47.48,95.405 C2.1 48.641,96.782 55.951,96.782 58.25,94.48 58.25,82.461 71.867,68.844 71.867,56.5 72.416,55.951 73.175,55.951 73.96,56.736 79.657,56.736 v1(82.263,59.342) ; v1(119.002,60.78) 119.454,60.325 U4.43
  Bottom Layer w0.4: v1(82.263,59.342) 83.698,60.78 v1(119.002,60.78)
PB5: C7.1 R8.2 U4.42 | length 76.2
  Top Layer w0.4: R8.2 67.93,95.39 C7.1 v1(67.945,92.631) ; v1(97.597,85.923) 97.597,81.996 116.711,62.883 122.375,62.883 U4.42
  Bottom Layer w0.4: v1(67.945,92.631) 74.653,85.923 v1(97.597,85.923)
PB6: C11.1 R20.2 U4.41 | length 77.3
  Top Layer w0.4: R20.2 67.93,82.436 C11.1 v1(67.945,77.602)
  Bottom Layer w0.4: v1(67.945,77.602) 67.948,77.602 67.948,66.002 75.108,58.842 79.342,58.842 84.836,64.336 U4.41
PB7: C3.1 R15.2 U4.40 | length 121.9
  Top Layer w0.4: R15.2 47.463,89.04 47.48,89.055 C3.1 48.641,90.432 48.349,90.724 v1(48.349,92.367) ; v1(122.258,95.796) 122.433,95.796 126.914,91.318 126.914,70.528 123.825,67.44 U4.40
  Bottom Layer w0.4: v1(48.349,92.367) 60.32,104.338 92.291,104.338 93.797,105.847 102.959,105.847 113.01,95.796 v1(122.258,95.796)
PB8: C6.1 R6.2 U4.39 | length 64.3
  Top Layer w0.4: R6.2 89.012,101.994 C6.1 89.027,103.386 95.321,103.386 96.703,102.004 96.703,86.972 96.69,86.957 96.69,80.287 v1(110.104,66.876)
  Bottom Layer w0.4: v1(110.104,66.876) U4.39
PB9: C10.1 R18.2 U4.38 | length 69.7
  Top Layer w0.4: R18.2 87.595,88.786 87.612,88.801 C10.1 89.027,87.424 v1(89.027,87.31) ; v1(114.288,89.014) 114.288,92.789 v1(115.017,93.52) ; v1(123.386,93.52) 123.48,93.52 126.111,90.889 126.111,71.699 U4.38
  Bottom Layer w0.4: v1(89.027,87.31) 90.732,89.014 v1(114.288,89.014) ; v1(115.017,93.52) v1(123.386,93.52)
PB#: C9.1 R17.2 U4.35 | length 66.3
  Top Layer w0.4: R17.2 67.021,88.786 67.038,88.801 C9.1 67.945,87.424 v1(67.945,86.352) ; v1(111.316,81.808) 111.316,79.383 118.745,71.956 U4.35
  Bottom Layer w0.4: v1(67.945,86.352) 71.222,83.078 98.004,83.078 100.282,80.8 106.706,80.8 107.714,81.808 v1(111.316,81.808)
PB*: C4.1 R16.2 U4.36 | length 116.3
  Top Layer w0.4: R16.2 47.463,82.436 47.463,81.399 47.79,81.074 v1@48.641,81.074 ; C4.1 v1@48.641,81.074 ; v1(48.796,80.957) 48.758,80.957 v1@48.641,81.074 ; U4.36 125.237,73.368 125.237,89.662 v1(124.529,90.371)
  Bottom Layer w0.4: v1(48.796,80.957) 71.174,103.335 92.423,103.335 94.028,104.94 102.195,104.94 116.767,90.371 v1(124.529,90.371)
Q1_1: Q1.1 R25.2 | length 14.8
  Top Layer w0.4: v1(82.741,145.771) 82.741,144.841 Q1.1
  Bottom Layer w0.4: R25.2 81.9,152.126 79.083,152.126 78.682,151.724 78.682,149.454 81.415,146.721 81.791,146.721 v1(82.741,145.771)
Q2_1: Q2.1 R26.2 | length 2.5
  Top Layer w0.4: R26.2 77.981,147.447 78.423,147.889 Q2.1
Q3_1: Q3.1 R27.2 | length 50.2
  Top Layer w0.4: v1(60.523,113.871) 61.834,115.179 R27.2 ; v1(79.774,115.593) 79.947,115.766 79.947,117.155 Q3.1
  Bottom Layer w0.4: v1(60.523,113.871) 67.046,107.348 85.413,107.348 88.532,110.467 88.532,111.387 84.326,115.593 v1(79.774,115.593)
Q4_1: Q4.1 R28.2 | length 25.6
  Top Layer w0.4: R28.2 64.12,108.224 67.211,108.224 v1(67.341,108.354) ; Q4.1 86.21,109.535 v1(86.332,109.657)
  Bottom Layer w0.4: v1(67.341,108.354) 85.029,108.354 v1(86.332,109.657)
Q5_1: Q5.1 R29.2 | length 5
  Top Layer w0.4: R29.2 82.916,118.384 83.879,118.384 84.265,118.77 84.265,119.695 Q5.1
Q6_1: Q6.1 R30.2 | length 3.3
  Top Layer w0.4: R30.2 71.885,152.273 72.327,152.715 Q6.1
Q7_1: Q7.1 R31.2 | length 21.1
  Top Layer w0.4: R31.2 70.724,115.804 73.221,115.804 v1(74.719,117.302) ; Q7.1 86.21,114.615 86.442,114.846 v1(86.442,115.872)
  Bottom Layer w0.4: v1(74.719,117.302) 85.398,117.302 86.442,116.258 v1(86.442,115.872)
Q8_1: Q8.1 R32.2 | length 7.8
  Top Layer w0.4: R32.2 75.55,110.764 78.89,110.764 80.201,112.075 Q8.1
Q9_1: Q9.1 R55.2 | length 4.5
  Top Layer w0.4: R55.2 47.864,68.092 49.507,68.092 49.721,67.879 Q9.1
Q9_2: Q9.2 Q10.2 Q11.2 | length 22.8
  Top Layer w0.4: Q9.2 52.174,65.979 v1(52.174,63.271) ; Q10.2 58.27,65.979 v1(58.27,63.271) ; v1(64.247,63.271) 64.247,65.563 Q11.2
  Bottom Layer w0.4: v1(52.174,63.271) v1(58.27,63.271) v1(64.247,63.271)
Q10_1: Q10.1 R56.2 | length 17.2
  Top Layer w0.4: v1(55.817,61.234) 55.817,67.879 Q10.1
  Bottom Layer w0.4: R56.2 47.864,61.234 v1(55.817,61.234)
Q11_1: Q11.1 R57.2 | length 24.8
  Top Layer w0.4: v1(63.259,59.817) 63.259,67.701 63.437,67.879 Q11.1
  Bottom Layer w0.4: R57.2 v1(63.259,59.817)
Q12_1: Q12.1 R58.2 | length 5.5
  Top Layer w0.4: R58.2 101.712,108.732 102.766,108.732 104.077,110.043 Q12.1
Q13_1: Q13.1 R60.2 | length 6.5
  Top Layer w0.4: R60.2 116.474,81.26 117.92,82.705 117.92,84.521 Q13.1
REL: R58.1 U4.27 | length 37.5
  Top Layer w0.4: R58.1 99.71,108.732 100.483,107.963 v1(100.483,103.213)
  Bottom Layer w0.4: v1(100.483,103.213) 101.438,103.213 121.285,83.365 U4.27
RGB_B: Q9.3 R43.1 R44.1 | length 16.2
  Top Layer w0.4: R43.1 54.59,69.738 54.59,67.765 Q9.3@53.754,66.929 ; Q9.3 Q9.3@53.754,66.929 ; R44.1 53.615,58.278 53.615,64.917 54.674,65.977 54.674,66.929 Q9.3@53.754,66.929
RGB_G: Q10.3 R42.1 R45.1 | length 15.7
  Top Layer w0.4: R45.1 60.77,61.516 60.77,66.929 Q10.3@60.158,66.929 ; Q10.3 Q10.3@60.158,66.929 ; R42.1 60.94,69.738 60.94,67.711 Q10.3@60.158,66.929
RGB_R: Q11.3 R41.1 R46.1 | length 20.7
  Top Layer w0.4: R46.1 61.448,58.278 63.074,58.278 68.39,63.591 68.39,66.929 ; R41.1 67.798,69.738 68.39,69.146 68.39,66.929 ; 68.39,66.929 Q11.3 68.39,66.929
SEG1_1: R51.2 SEG1.1 | length 3.6
  Bottom Layer w0.4: R51.2 SEG1.1
SEG1_2: R50.2 SEG1.2 | length 3.6
  Bottom Layer w0.4: R50.2 SEG1.2
SEG1_3: R54.2 SEG1.3 | length 3.6
  Bottom Layer w0.4: R54.2 SEG1.3
SEG1_4: R49.2 SEG1.4 | length 3.6
  Bottom Layer w0.4: R49.2 SEG1.4
SEG1_5: R53.2 SEG1.5 | length 5.5
  Bottom Layer w0.4: R53.2 78.07,120.79 78.07,122.984 SEG1.5
SEG1_7: R48.2 SEG1.7 | length 4.2
  Top Layer w0.4: R48.2 80.498,141.874 80.498,140.866 SEG1.7
SEG1_10: R52.2 SEG1.10 | length 4.9
  Top Layer w0.4: R52.2 72.878,142.636 72.878,140.866 SEG1.10
SEG1_11: R47.2 SEG1.11 | length 3.1
  Top Layer w0.4: R47.2 68.961,139.713 SEG1.11
T1_4: D3.1 T1.4 | length 9.8
  Top Layer w0.4: D3.1 114.61,137.97
  Top Layer w1: 114.61,137.97 118.865,142.227 T1.4
T1_6: D3.2 T1.6 | length 25.1
  Top Layer w0.4: D3.2 116.111,141.869
  Top Layer w1: 116.111,141.869 116.111,146.431 120.391,146.431 120.391,133.835 T1.6
VCC: D3.3 U1.3 U2.1 U3.1 | length 37.4
  Top Layer w0.4: 104.107,141.869 D3.3
  Top Layer w1: U1.3 99.959,139.085 102.743,141.869 ; U3.1 102.743,141.869 ; 104.107,141.869 102.743,141.869
  Bottom Layer w1: U3.1 102.743,152.019 109.776,152.019 113.919,152.019 U2.1
pads on no net: T1.2 T1.5 U4.1 U4.2 U4.3 U4.6 U4.8 U4.11 U4.12 U4.13 U4.14 U4.15 U4.16 U4.17 U4.18 U4.19 U4.20 U4.21 U4.22 U4.23 U4.24 U4.25 U4.26 U4.28 U4.30 U4.31 U4.59 U4.60 U4.61 U4.63 U4.64

## Polygon pours and split planes (outlines as drawn)
GND on Bottom Layer (solid): 38.481,153.797 38.735,153.543 123.063,153.543 122.809,153.289 122.809,127.889 122.555,127.635 114.173,127.635 113.665,127.127 113.665,102.489 123.571,102.489 129.667,102.489 129.667,38.227 129.413,38.227 38.481,38.481 38.481,153.797
GND on Top Layer (solid): 38.481,153.797 123.063,153.543 122.809,127.635 114.173,127.635 113.665,102.489 129.667,102.489 129.667,38.227 129.159,38.481 38.481,38.481 38.481,38.735 38.481,153.797 38.481,153.543